# Altium PCB PCB1.pcbdoc (part 2 of 2)
Units mil, origin at the board's own origin, x right, y up, seen from the top; angles counter-clockwise.
Board outline 2780 x 2060 mil, 2 copper layers (Top Layer, Bottom Layer); 80 components, 64 nets, 301 pads, 176 vias.
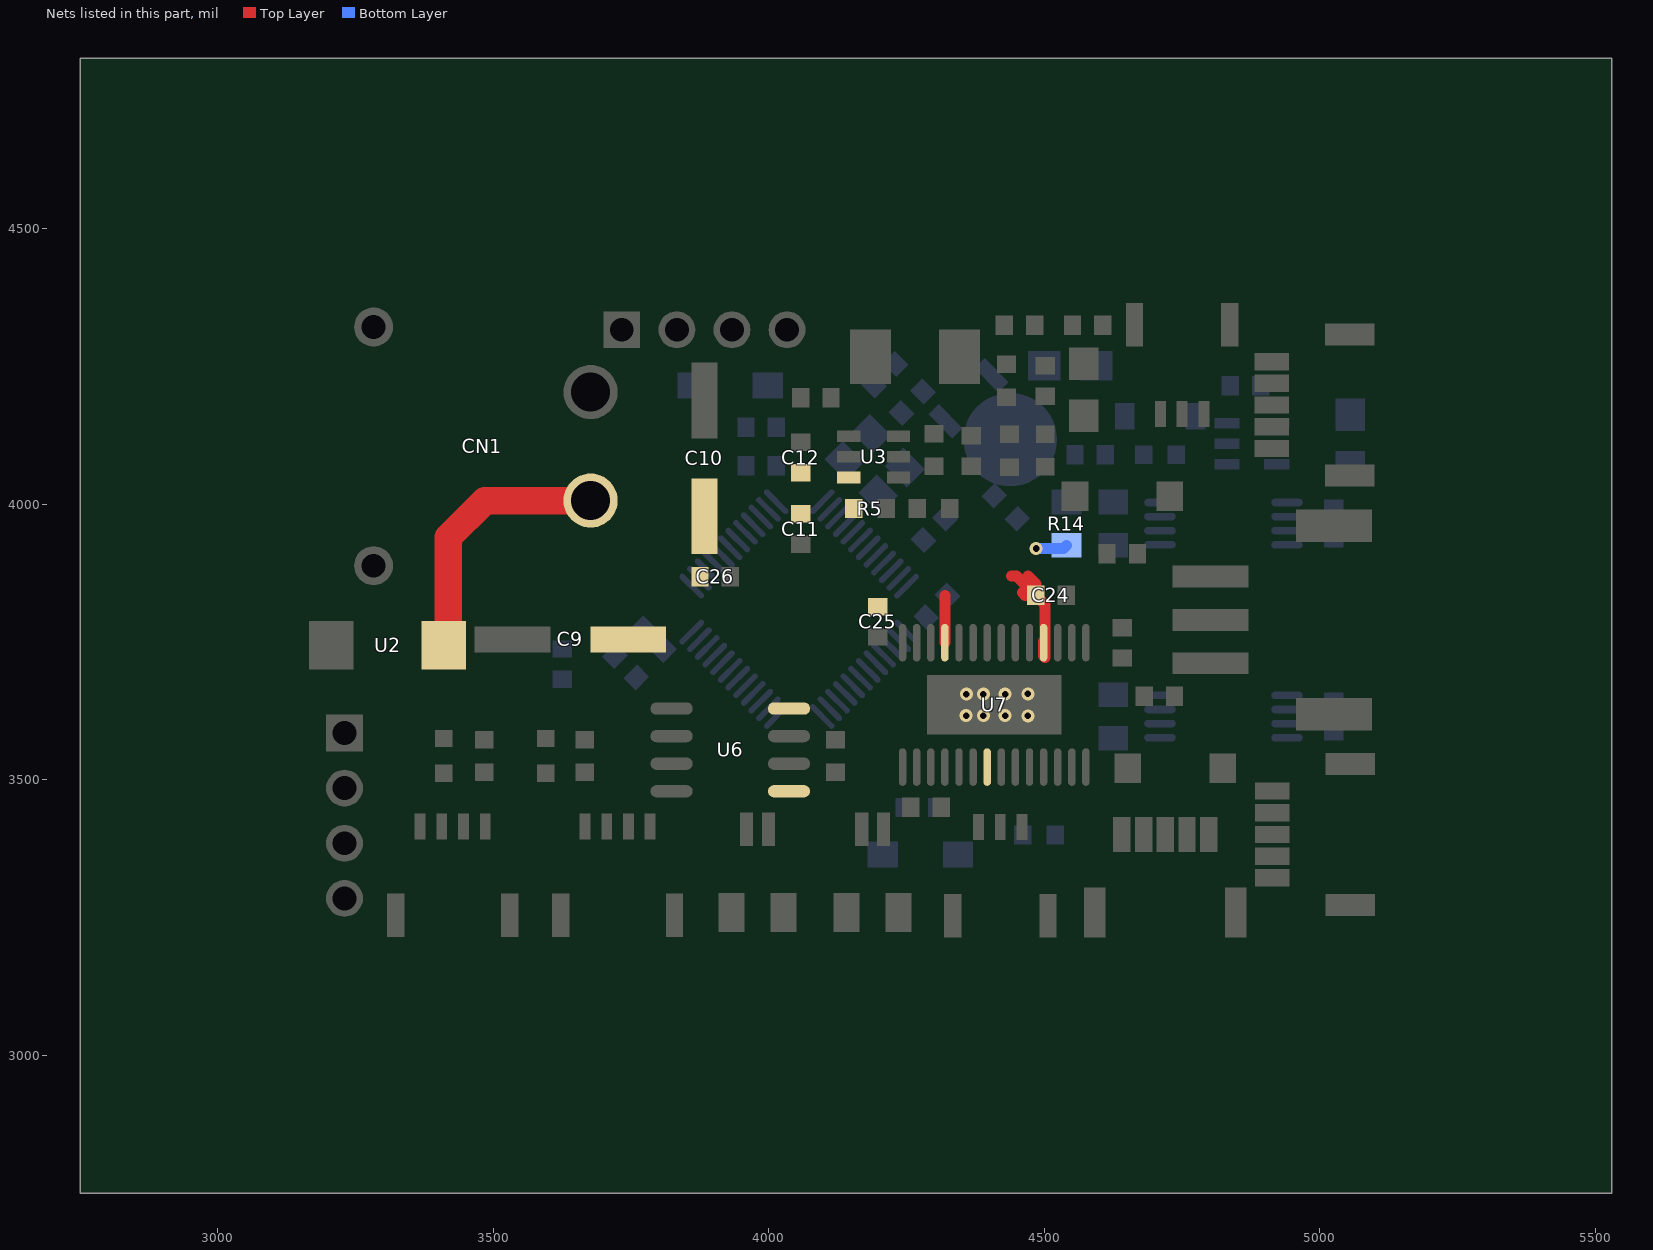
[diagram p2: the nets of this part, all layers, seen from the top]

## Via types
v1: diameter 24.02, hole 12.01, Top Layer to Bottom Layer, 87 vias
v2: diameter 23.62, hole 11.81, Top Layer to Bottom Layer, 34 vias
v3: diameter 24.02, hole 11.97, Top Layer to Bottom Layer, 26 vias
v4: diameter 20.87, hole 12.01, Top Layer to Bottom Layer, 7 vias
v5: diameter 35.43, hole 12.01, Top Layer to Bottom Layer, 5 vias
v6: diameter 25, hole 12.01, Top Layer to Bottom Layer, 3 vias
v7: diameter 49.37, hole 11.81, Top Layer to Bottom Layer, 3 vias
v8: diameter 22.83, hole 12.01, Top Layer to Bottom Layer, 3 vias
v9: diameter 22.44, hole 12.01, Top Layer to Bottom Layer, 2 vias
v10: diameter 24.02, hole 11.81, Top Layer to Bottom Layer, 1 vias
v11: diameter 49.21, hole 12.01, Top Layer to Bottom Layer, 1 vias
v12: diameter 31.5, hole 12.01, Top Layer to Bottom Layer, 1 vias
v13: diameter 23.62, hole 12.01, Top Layer to Bottom Layer, 1 vias
v14: diameter 19.68, hole 12.01, Top Layer to Bottom Layer, 1 vias
v15: diameter 24.41, hole 12.01, Top Layer to Bottom Layer, 1 vias

## Nets (pads, with @x,y where several pads share a name; then routed paths per layer and width w, separated by ;. In a path a pad name is that pad's centre, name@x,y a point inside that pad or via, vN(x,y) a via of type N, cw(c..) or ccw(c..) an arc to the next point about the centre after c; other vN are vias at no path point) (continued)
VCC: C9.1 C10.1 C11.2 C12.2 C24.1 C25.2 C26.2 CN1.2 R5.2 R14.2 U2.1 U3.3 U7.4 U7.11 | length 915.2
  Top Layer w20: U7.11@4319.44,3749.01 4319.44,3835 ; 4440,3870 4449.44,3870 C24.1@4469.72,3849.72 ; 4465,3835 4460,3840 C24.1@4469.72,3849.72 ; C24.1@4469.72,3849.72 4470,3850 4470,3870 4484.44,3855.56 C24.1@4484.44,3835 4501.42,3818.02 U7.4@4501.42,3755.05 ; U7.4@4501.42,3755.05 4498.58,3752.21 U7.4@4498.58,3749.01 4498.58,3725.28 4501.42,3722.44 U7.4@4501.42,3755.05
  Top Layer w50: U2.1@3415.29,3730.26 3418.27,3733.24 3418.27,3940.26 3484.84,4006.83 CN1.2@3676.51,4006.83
  Bottom Layer w20: v1(4485,3920) 4534.37,3920 R14.2@4540,3925.63
"": U6.5 U6.8 U7.21
  other v2: 4470.01,3616.19 4358.01,3616.69 4389.32,3616.5 4428.69,3616.5 4358.51,3655.69 4389.32,3655.87 4428.69,3655.87 4470.01,3656.19

## Polygon pours and split planes (outlines as drawn)
AGND on Bottom Layer (solid, remove dead copper, pour order 1): 5015,4115 5101.13,4115 5101.13,4220 5015,4220
AGND on Bottom Layer (solid, remove dead copper, pour order 2): 5015,4105 5110,4105 5110,4220 5015,4220
GND on Bottom Layer (solid, remove dead copper, pour order 3): 3020,3050 5230,3050 5230,4430 3020,4430
GND on Top Layer (solid, remove dead copper, pour order 5): 3070,3035 5250,3035 5250,4475 3070,4475
GND on Bottom Layer (solid, remove dead copper, pour order 6): 3000,3000 5280,3000 5280,4560 3000,4560
AGND on Bottom Layer (solid, remove dead copper, pour order 0): 4138.14,3876.13 4205.94,3803.94 4269.06,3803.94 4340.94,3733.94 4436.26,3733.94 4500.94,3668.94 4500.94,3573.84 4561.22,3509.02 5112.72,3509.02 5112.72,4204.97 5010.05,4204.97 4969.02,4163.94 4945.94,4163.94 4935.94,4173.94 4935.94,4243.82 4920.83,4258.94 4620.94,4258.94 4490.94,4128.94 4490.94,4067.18 4400.84,3978.94 4390.94,3978.94 4315.94,4053.94
VCC on Top Layer (solid, remove dead copper, pour order 4): 4086.21,4068.79 4094.99,4060 4175,4060 4185,4050 4185,3955 4200,3940 4490,3940 4510,3920 4510,3715 4505,3710 4496.74,3710 4488.93,3716.2 4488.93,3813.03 4481.96,3820 4335,3820 4330,3815 4330,3715 4325,3710 4313.54,3710 4310,3713.56 4310,3805 4295,3820 4205,3820 4155,3870 4115,3870 4095,3890 4095,3946.03 4086.08,3954.95 4074.8,3954.95

## Keep-outs
Board Outline Layer:
  lines w10 net "": 3148.27,3277.89 ccw(c3227.01,3277.89) 3227.01,3199.15 5038.03,3199.15 ccw(c5038.03,3277.89) 5116.77,3277.89 5116.77,4301.52 ccw(c5038.03,4301.52) 5038.03,4380.26 3227.01,4380.26 ccw(c3227.01,4301.52) 3148.27,4301.52 3148.27,3277.89

## Other copper
Top Layer:
  region net 3V3: 4260,3488.82 4301.14,3488.82 4301.14,3555 4260,3555
  region net VCC: 4022.56,3955 4175,3955 4175,4007.92 4022.56,4007.92
  region net VCC: 3828.27,3720.26 3675.83,3720.26 3668.27,3727.82 3668.27,3888.16 3623.27,3933.16 3623.27,4055.07 3637.57,4070.77 4083.57,4070.77 4083.57,3970.85 4074.8,3954.95 3947.97,3954.95 3828.27,3835.26
  region net DRV_OUT_3_CS: 4366.52,3713.13 4376.07,3713.13 4380.57,3717.96 4380.94,3782.63 4383.06,3786.53 4383.18,3801.05 4379.37,3805.79 4363.21,3805.79 4356.01,3796.39 4360.33,3776.63 4360.33,3717.02 4364.18,3713.17 4364.18,3713.14 4366.51,3713.14
  region net DRV_OUT_2: 4386.56,3717.51 4390.5,3712.79 4402.05,3712.79 4402.17,3712.68 4406.06,3716.57 4406.62,3778.88 4417.58,3790.87 4417.58,3802.74 4412.39,3807.93 4395.3,3807.93 4390.62,3801.97 4390.29,3786.34 4387.32,3779.9
  region net DRV_OUT_1_CS: 4462.51,3718.86 4468.32,3712.91 4477.78,3712.91 4481.98,3716.94 4481.98,3800.52 4476.41,3806.09 4463.88,3806.09 4457.5,3799.71 4457.5,3785.47 4462.51,3780.46
  region net +5V: 4310.17,4320 4385,4320 4385,4345 4445,4345 4445,4300 4460,4285 4524.68,4285 4534.53,4275.15 4534.53,4233.49 4524.73,4223.69 4393.69,4223.69 4385,4215 4310,4215 4305,4220 4305,4314.83
  region net VCC: 3890.33,3897.59 3890.33,3851.44 3836.92,3851.44 3836.92,3896.34 3835.9,3897.37
  region net NRST: 4521.02,4041.74 4529.23,4047.68 cw(c4555.74,4074.19) 4518.62,4068.89 4499.81,4052.34 cw(c4494.51,4015.22)
  region net 3V3: 4481.46,4108.54 4488.54,4101.46 cw(c4513.84,4076.16) 4509.34,4111.66 4484.6,4122.28 cw(c4472.09,4117.91)
  region net NRST: 4619.71,3945.72 4607.71,3945.72 cw(c4585.21,3945.72) 4598.71,3927.72 4628.71,3927.72 cw(c4642.21,3945.72)
  region net VCC: 3609.51,4031.83 3609.51,3981.83 3611.53,3981.77 3614.78,3981.48 3618.2,3980.94 3621.74,3980.19 3625.33,3979.22 3628.89,3978.07 3632.37,3976.73 3635.68,3975.24 3638.76,3973.59 3640.65,3972.42 3642.39,3971.2 3643.96,3969.92 3643.96,4043.74 3642.39,4042.47 3640.65,4041.24 3638.76,4040.07 3635.68,4038.42 3632.37,4036.93 3628.89,4035.59 3625.33,4034.44 3621.74,4033.47 3618.2,4032.72 3614.78,4032.18 3611.53,4031.89
  region net VCC: 3443.27,3863.42 3393.27,3863.42 cw(c3261.06,3863.42) 3369.94,3788.42 3450.55,3788.42 cw(c3833.34,3863.42)
  region net TPS_SW: 4176.17,4078.67 4176.17,4093.67 cw(c4176.17,4127.3) 4165.97,4095.25 4165.97,4077.08 cw(c4176.17,4045.04)
  region net TPS_EN: 4203.64,4075.13 4207.75,4065.09 cw(c4294.52,3978.31) 4219.84,4075.69 4214.25,4087.22 cw(c4116.86,4161.9)
  region net $1N3797: 4214.76,4155.25 4193.04,4148.7 cw(c4019.48,3975.14) 4214.25,4124.5 4238.96,4134.04 cw(c4388.32,4328.81)
  region net TPS_EN: 4243.85,3985 4243.85,3995 cw(c4243.85,4013.75) 4228.85,4002.5 4228.85,3977.5 cw(c4243.85,3966.25)
  region net TPS_EN: 4238.24,3995 4238.24,3985 cw(c4238.24,3966.25) 4253.24,3977.5 4253.24,4002.5 cw(c4238.24,4013.75)
  region net $1N3797: 4158.6,4183.87 4158.6,4203.87 cw(c4158.6,4266.05) 4128.6,4211.59 4128.6,4176.15 cw(c4158.6,4121.7)
  region net TPS_SW: 4080.75,4160.24 4089.39,4172.82 cw(c4129.16,4212.59) 4073.48,4204.64 4048.93,4176.15 cw(c4040.98,4120.47)
  region net TPS_SW: 4070.23,4224.67 4045.23,4224.67 cw(c4011.45,4224.67) 4042.6,4211.59 4072.87,4211.59 cw(c4104.02,4224.67)
  region net +5V: 4511.21,4227.93 4525.35,4242.07 cw(c4544.47,4261.19) 4519.44,4250.97 4500.34,4235.81 cw(c4481.02,4197.74)
  region net $1N4136: 4393.1,4172.44 4406.46,4157.53 ccw(c4387.33,4176.66) 4414.31,4178.74 4414.31,4210.49 cw(c4336.74,4228.8)
  region net $1N4136: 4346.48,4118.38 4346.48,4138.38 cw(c4346.48,4352.77) 4316.48,4140.49 4316.48,4116.27 cw(c4346.48,3903.99)
  region net $1N4196: 4269.18,4052.9 4283.32,4038.76 cw(c4318.21,4003.87) 4316.48,4053.18 4282.47,4053.18 ccw(c4275.97,4046.11)
  region net $1N4196: 4346.48,4059.06 4346.48,4079.06 cw(c4346.48,4293.45) 4316.48,4081.17 4316.48,4056.95 cw(c4346.48,3844.67)
  region net $1N4136: 4319.35,4138.38 4319.35,4118.38 cw(c4319.35,4066.86) 4349.35,4108.74 4349.35,4140.24 cw(c4319.35,4381.11)
  region net $1N4136: 4405.99,4157.05 4382.11,4161.45 cw(c4208.55,4335.01) 4357.91,4140.24 4384.78,4114.63 cw(c4459.02,4104.02)
  region net $1N4196: 4319.35,4079.06 4319.35,4059.06 cw(c4319.35,3973.54) 4349.35,4053.62 4349.35,4085.12 cw(c4319.35,4156.33)
  region net $1N4196: 4414.78,4059.06 4414.78,4079.06 cw(c4414.78,4293.45) 4384.78,4081.17 4384.78,4056.95 cw(c4414.78,3844.67)
  region net $1N4196: 4389.76,4079.06 4389.76,4059.06 cw(c4389.76,3994.89) 4419.76,4051.61 4419.76,4083.36 cw(c4389.76,4185.72)
  region net CAN_TX: 3848.54,3647.45 3838.22,3651.29 3836.65,3649.8 3834.94,3648.34 3833.1,3646.93 3831.16,3645.6 3829.13,3644.37 3827.04,3643.28 3824.91,3642.34 3823.47,3641.82 3822.02,3641.38 3820.58,3641.05 3819.14,3640.81 3817.72,3640.69 3817.01,3640.68 3852.26,3640.57 3851.55,3640.71 3850.87,3640.91 3850.24,3641.17 3849.65,3641.49 3849.12,3641.85 3848.65,3642.26 3848.24,3642.7 3847.91,3643.18 3847.65,3643.68 3847.48,3644.2 3847.39,3644.74 3847.4,3645.29 3847.52,3645.84 3847.74,3646.39 3848.08,3646.93
  region net 3V3: 3779.49,3539.49 3779.49,3519.49 3796.3,3518.3 3796.3,3540.68
  region net CAN_RX: 3865,3474.49 3865,3484.49 3864.14,3484.76 3853.22,3489.71 3851.56,3490.41 3850.7,3490.68 3850.7,3468.3 3851.56,3468.57 3862.48,3473.52 3864.14,3474.22
  region net CAN_H: 4091.15,3573.49 4091.15,3585.49 4089.72,3585.71 4064.16,3590.62 4063.7,3590.68 4063.7,3568.3 4065.13,3568.52 4090.68,3573.43
  region net CAN_H: 3981.85,3585.49 3981.85,3573.49 3983.47,3573.55 3984.99,3573.71 3986.42,3573.95 3989.03,3574.56 3991.95,3575.29 3993.03,3575.49 3994.09,3575.6 3994.61,3575.61 3995.12,3575.59 3995.63,3575.53 3996.13,3575.43 3996.64,3575.29 3997.15,3575.1 3997.65,3574.86 3998.16,3574.57 3998.68,3574.23 3999.2,3573.82 3999.72,3573.36 4000.25,3572.83 4000.79,3572.22 4000.79,3586.76 4000.25,3586.15 3999.72,3585.62 3999.2,3585.16 3998.68,3584.75 3998.16,3584.41 3997.65,3584.12 3997.15,3583.88 3996.64,3583.69 3996.13,3583.55 3995.63,3583.45 3995.12,3583.39 3994.61,3583.37 3994.09,3583.38 3993.03,3583.49 3991.95,3583.69 3988.41,3584.58 3986.42,3585.03 3984.99,3585.27 3983.47,3585.43
  region net CAN_L: 4140.89,3485.04 4150.51,3492.4 cw(c4182.33,3524.22) 4137.78,3517.85 4115.44,3497.77 cw(c4109.07,3453.22)
  region net CAN_H: 4085.77,3585.49 4085.77,3573.49 cw(c4085.77,3550.99) 4103.77,3564.49 4103.77,3586.76 cw(c4085.77,3714.12)
  region net CAN_H: 4140.89,3544.36 4150.51,3551.72 cw(c4182.33,3583.54) 4137.78,3577.17 4115.44,3557.09 cw(c4109.07,3512.54)
  region net $1N7023: 4605.97,3791 4605.97,3779 cw(c4605.97,3756.5) 4623.97,3770 4623.97,3791.97 cw(c4605.97,3957.71)
  region net $1N7020: 4613.73,3703.6 4622.21,3695.12 cw(c4647.06,3670.27) 4645.18,3705.36 4623.97,3726.57 cw(c4588.88,3728.45)
  region net $1N7264: 4520.76,3814.24 4529.24,3805.76 cw(c4615.89,3719.11) 4542.56,3817.28 4523.81,3830.02 cw(c4510.61,3824.39)
  region net PWM_AUX1: 4795.37,4204.37 4783.37,4204.37 cw(c4746.22,4204.37) 4779.53,4187.92 4799.21,4187.92 cw(c4832.52,4204.37)
  region net 3V3: 3774.46,4270.58 3779.21,4282.8 cw(c3811.03,4314.62) 3766.48,4308.26 3749,4283.31 cw(c3742.64,4238.76)
  region net CAN_H: 4213.94,3459.28 4201.94,3459.28 cw(c4073.31,3459.28) 4200.68,3441.28 4215.21,3441.28 cw(c4342.58,3459.28)
  region net CAN_L: 4174.58,3459.28 4162.58,3459.28 cw(c4033.95,3459.28) 4161.32,3441.28 4175.85,3441.28 cw(c4303.22,3459.28)
  region net +5V: 4875,4110 4875,4090 cw(c4875,4080.67) 4880.91,4087.89 4880.91,4112.11 cw(c4875,4119.33)
  region net +5V: 4900,4055.77 4920,4055.77 cw(c4957.5,4055.77) 4935,4085.77 4885,4085.77 cw(c4862.5,4055.77)
  region net ENC_A: 4960,4171.26 4960,4191.26 cw(c4960,4220.95) 4943.9,4196 4943.9,4164.51 cw(c4960,4148.69)
  region net ENC_B: 4960,4210.63 4960,4230.63 cw(c4960,4260.32) 4943.9,4235.37 4943.9,4203.88 cw(c4960,4188.06)
  region net ENC_Z: 4960,4250 4960,4270 cw(c4960,4299.69) 4943.9,4274.74 4943.9,4243.25 cw(c4960,4227.43)
  region net +5V: 4871.74,3332.33 4871.74,3312.33 cw(c4871.74,3287.57) 4881.74,3310.22 4881.74,3334.44 cw(c4871.74,3357.09)
  region net SPI1_MOSI: 4958.93,3395.07 4958.93,3407.07 cw(c4958.93,3422.77) 4944.73,3416.07 4944.73,3386.07 cw(c4958.93,3379.36)
  region net SPI1_MISO: 4959.41,3429.63 4959.41,3449.63 cw(c4959.41,3469.34) 4944.73,3456.18 4944.73,3424.69 cw(c4959.42,3405.32)
  region net SPI1_SCK: 4959.41,3469 4959.41,3489 cw(c4959.41,3508.71) 4944.73,3495.55 4944.73,3464.06 cw(c4959.42,3444.69)
  region net $1N11754: 3440.88,3508.83 3440.88,3518.83 cw(c3440.88,3537.58) 3425.88,3526.33 3425.88,3501.33 cw(c3440.88,3490.08)
  region net $1N11757: 3625.89,3507.21 3625.89,3517.21 cw(c3625.89,3535.96) 3610.89,3524.71 3610.89,3499.71 cw(c3625.89,3488.46)
  region net $1N11754: 3451.45,3518.83 3451.45,3508.83 cw(c3451.45,3490.08) 3466.45,3501.33 3466.45,3526.33 cw(c3451.45,3537.58)
  region net 3V3: 3453.72,3551.9 3463.34,3544.55 cw(c3495.16,3512.73) 3488.8,3557.27 3466.45,3577.35 cw(c3421.9,3583.72)
  region net $1N11757: 3633.77,3517.21 3633.77,3507.21 cw(c3633.77,3488.46) 3648.77,3499.71 3648.77,3524.71 cw(c3633.77,3535.96)
  region net KEY: 4675.05,3616.5 4687.05,3616.5 cw(c4709.55,3616.5) 4696.05,3634.5 4666.05,3634.5 cw(c4652.55,3616.5)
  region net KEY: 4645.39,3476.73 4657.39,3476.73 cw(c4679.89,3476.73) 4666.39,3494.73 4636.39,3494.73 cw(c4622.89,3476.73)
  region net KEY: 4685.3,3546.93 4676.81,3555.41 cw(c4659.3,3572.92) 4656.94,3548.27 4675.6,3524.5 cw(c4708.75,3523.47)
  region net NRST: 4586.57,3975.5 4592.5,3986.54 cw(c4624.32,4018.36) 4579.77,4012 4561.12,3988.23 cw(c4554.75,3943.68)
  region net NRST: 4524.52,4052.38 4520.74,4042.02 cw(c4494.22,4015.5) 4531.35,4020.81 4545.74,4041.77 cw(c4551.04,4078.89)
  region net $1N7020: 4544,3710 4556,3710 4556.51,3721.68 4543.01,3721.68 4543.96,3710.75
  region net DRV_EN: 4415.8,3485.48 4427.8,3485.48 4428.52,3495.33 4428.55,3496.03 4415.05,3496.03 4415.77,3486.18
  region net DRV_FAULT: 4329.21,3478.72 4336.8,3485.27 4335.81,3486.18 4334.82,3486.95 4333.85,3487.59 4332.91,3488.13 4330.28,3489.43 4329.51,3489.83 4328.8,3490.25 4328.46,3490.48 4328.15,3490.73 4327.86,3490.99 4327.59,3491.28 4327.34,3491.59 4327.11,3491.93 4326.9,3492.3 4326.72,3492.7 4326.56,3493.15 4326.43,3493.63 4326.33,3494.16 4326.26,3494.73 4326.21,3495.35 4326.19,3496.03 4312.69,3496.03 4312.74,3494.48 4312.84,3493.54 4312.98,3492.68 4313.16,3491.88 4313.38,3491.15 4313.64,3490.47 4313.95,3489.85 4314.28,3489.28 4314.66,3488.75 4315.07,3488.26 4315.51,3487.81 4315.98,3487.39 4316.48,3487 4317.28,3486.44 4318.44,3485.75 4322.42,3483.67 4324.24,3482.62 4325.75,3481.63 4326.89,3480.78 4328.05,3479.81
  region net 3V3: 4281.46,3503.09 4285.62,3513.07 4284.63,3514 4283.64,3514.81 4282.2,3515.84 4279.1,3517.77 4278.33,3518.3 4277.62,3518.85 4277.28,3519.14 4276.97,3519.45 4276.68,3519.77 4276.41,3520.11 4276.16,3520.47 4275.93,3520.86 4275.72,3521.28 4275.54,3521.72 4275.38,3522.2 4275.25,3522.72 4275.15,3523.27 4275.08,3523.86 4275.01,3525.17 4275.01,3498.93 4275.06,3499.64 4275.18,3500.32 4275.38,3500.97 4275.64,3501.58 4275.96,3502.14 4276.34,3502.65 4276.76,3503.09 4277.22,3503.46 4277.71,3503.76 4278.23,3503.98 4278.77,3504.1 4279.31,3504.12 4279.86,3504.04 4280.41,3503.84 4280.94,3503.53
  region net 3V3: 3467.85,3566.02 3476.33,3557.54 3476.69,3557.87 3477.5,3558.54 3478.44,3559.18 3479.46,3559.78 3480.53,3560.31 3481.62,3560.76 3482.69,3561.1 3483.21,3561.22 3483.72,3561.31 3484.2,3561.36 3471.67,3573.89 3471.53,3572.9 3471.26,3571.85 3470.86,3570.77 3470.37,3569.68 3469.8,3568.63 3469.17,3567.65 3468.51,3566.77
  region net 3V3: 3383.08,3463.07 3374.6,3471.56 3374.24,3471.22 3373.41,3470.56 3372.44,3469.92 3371.39,3469.32 3370.27,3468.79 3369.15,3468.34 3368.05,3468 3367.52,3467.87 3367.01,3467.79 3366.53,3467.74 3379.26,3455 3379.4,3455.99 3379.68,3457.07 3380.07,3458.18 3380.57,3459.31 3381.14,3460.4 3381.76,3461.42 3382.42,3462.32
  region net DRV_FAULT: 4340.67,3481.4 4333.6,3474.33 4334.02,3473.98 4334.52,3473.69 4335.07,3473.45 4335.67,3473.25 4336.95,3472.93 4338.88,3472.51 4339.47,3472.34 4340.01,3472.14 4340.49,3471.91 4340.89,3471.62 4341.2,3471.27 4341.42,3470.85 4341.51,3470.36 4354.25,3483.09 4353.46,3483.08 4352.61,3482.97 4351.73,3482.78 4349.88,3482.23 4346.08,3480.97 4345.16,3480.74 4344.28,3480.57 4343.44,3480.48 4342.65,3480.51 4341.91,3480.66 4341.25,3480.95
  region net SPI1_MOSI: 4943.65,3407.07 4943.65,3395.07 4944.23,3395.04 4944.8,3394.98 4945.37,3394.87 4945.94,3394.72 4946.5,3394.53 4947.06,3394.32 4948.14,3393.79 4949.19,3393.18 4950.2,3392.49 4951.62,3391.38 4952.06,3390.99 4952.06,3409.01 4951.61,3408.65 4951.16,3408.33 4950.68,3408.06 4950.2,3407.84 4949.7,3407.65 4949.19,3407.49 4948.67,3407.36 4947.61,3407.19 4946.51,3407.1
  region net CAN_TX: 4005.65,3945 4005.65,3935 4006.59,3934.96 4007.4,3934.84 4008.09,3934.65 4008.68,3934.39 4009.18,3934.06 4009.62,3933.68 4010.01,3933.25 4010.36,3932.77 4011.4,3931.09 4012.24,3929.84 4012.76,3929.18 4013.36,3928.52 4014.06,3927.85 4014.06,3945.86 4013.55,3945.45 4013.05,3945.12 4012.57,3944.87 4012.09,3944.69 4011.62,3944.57 4011.15,3944.51 4010.68,3944.49 4010.2,3944.51 4009.21,3944.62 4006.97,3944.94
  region net DRV_EN: 4425.2,3480.39 4416.72,3488.88 4416.36,3488.55 4415.53,3487.88 4414.57,3487.24 4413.51,3486.64 4412.4,3486.11 4411.27,3485.66 4410.17,3485.32 4409.64,3485.2 4409.13,3485.11 4408.65,3485.06 4421.39,3472.32 4421.52,3473.31 4421.8,3474.39 4422.2,3475.51 4422.69,3476.63 4423.26,3477.72 4423.88,3478.74 4424.54,3479.64
  region net DRV_IN1: 4147.32,3709.2 4155.8,3717.68 4155.47,3718.04 4154.81,3718.87 4154.17,3719.84 4153.57,3720.89 4153.03,3722.01 4152.58,3723.13 4152.24,3724.23 4152.12,3724.76 4152.03,3725.27 4151.98,3725.75 4139.25,3713.02 4140.24,3712.88 4141.31,3712.6 4142.43,3712.2 4143.56,3711.71 4144.65,3711.14 4145.66,3710.52 4146.57,3709.86
  region net DRV_IN1: 4234.79,3662.93 4234.79,3650.93 4235.27,3650.92 4236.33,3650.8 4237.47,3650.57 4238.64,3650.25 4239.8,3649.84 4240.92,3649.36 4241.93,3648.82 4242.4,3648.53 4242.82,3648.23 4243.19,3647.93 4243.19,3665.94 4242.4,3665.34 4241.44,3664.77 4240.37,3664.26 4239.22,3663.82 4238.05,3663.45 4236.89,3663.17 4235.79,3663
  region net DRV_EN: 4050.8,3692.32 4042.32,3700.8 4041.94,3700.33 4041.66,3699.77 4041.46,3699.15 4041.32,3698.48 4041.24,3697.78 4041.1,3694.91 4041.04,3694.26 4040.94,3693.66 4040.77,3693.12 4040.54,3692.68 4040.22,3692.33 4039.79,3692.09 4039.25,3691.98 4051.98,3679.25 4051.98,3679.99 4051.89,3680.79 4051.73,3681.63 4050.73,3685.27 4050.24,3687.11 4050.06,3688 4049.93,3688.86 4049.88,3689.67 4049.93,3690.44 4050.09,3691.14 4050.37,3691.77
  region net DRV_FAULT: 4191.39,3595.33 4179.39,3595.33 4179.37,3594.84 4179.25,3593.79 4179.02,3592.65 4178.7,3591.48 4178.29,3590.31 4177.81,3589.2 4177.27,3588.18 4176.98,3587.72 4176.69,3587.3 4176.38,3586.92 4194.39,3586.92 4193.79,3587.72 4193.23,3588.68 4192.72,3589.75 4192.27,3590.89 4191.9,3592.07 4191.62,3593.23 4191.45,3594.33
  region net DRV_FAULT: 4102.92,3695.03 4102.92,3707.03 4102.43,3707.04 4101.37,3707.16 4100.24,3707.39 4099.06,3707.72 4097.9,3708.13 4096.79,3708.61 4095.77,3709.14 4095.31,3709.43 4094.89,3709.73 4094.51,3710.03 4094.51,3692.02 4095.31,3692.63 4096.26,3693.19 4097.33,3693.7 4098.48,3694.15 4099.65,3694.51 4100.81,3694.79 4101.91,3694.97
  region net SENSE_3: 4962.32,3889.2 4970.8,3897.68 4970.47,3898.04 4969.81,3898.87 4969.17,3899.84 4968.57,3900.89 4968.03,3902.01 4967.58,3903.13 4967.24,3904.23 4967.12,3904.76 4967.03,3905.27 4966.98,3905.75 4954.25,3893.02 4955.24,3892.88 4956.31,3892.6 4957.43,3892.2 4958.56,3891.71 4959.65,3891.14 4960.66,3890.52 4961.57,3889.86
  region net SENSE_3: 4941,3544.94 4929,3544.94 4928.98,3544.45 4928.86,3543.39 4928.63,3542.26 4928.31,3541.09 4927.9,3539.92 4927.42,3538.81 4926.88,3537.79 4926.59,3537.33 4926.29,3536.91 4925.99,3536.53 4944,3536.53 4943.69,3536.91 4943.39,3537.33 4942.83,3538.28 4942.32,3539.36 4941.88,3540.5 4941.51,3541.67 4941.24,3542.83 4941.06,3543.93 4941.02,3544.45
  region net SENSE_BAT: 4524.2,3962.68 4532.68,3954.2 4533.04,3954.53 4533.87,3955.19 4534.84,3955.83 4535.89,3956.43 4537.01,3956.97 4538.13,3957.42 4539.23,3957.76 4539.76,3957.88 4540.27,3957.97 4540.75,3958.02 4528.02,3970.75 4527.88,3969.76 4527.6,3968.69 4527.2,3967.57 4526.71,3966.44 4526.14,3965.35 4525.52,3964.34 4524.86,3963.43
  region net 3V3: 4290,3431.35 4280,3431.35 4279.98,3430.78 4279.91,3430.21 4279.8,3429.64 4279.66,3429.08 4279.47,3428.51 4279.02,3427.41 4278.46,3426.33 4277.81,3425.29 4277.11,3424.3 4275.99,3422.94 4294.01,3422.94 4292.89,3424.3 4292.19,3425.29 4291.54,3426.33 4290.98,3427.41 4290.53,3428.51 4290.34,3429.08 4290.2,3429.64 4290.09,3430.21 4290.02,3430.78
  region net 3V3: 4096.42,4307.42 4096.42,4295.42 4097.41,4295.38 4098.33,4295.26 4099.17,4295.06 4099.96,4294.8 4100.7,4294.47 4101.39,4294.08 4102.05,4293.63 4102.69,4293.14 4103.92,4292.04 4107.17,4288.82 4107.92,4288.13 4107.92,4314.71 4106.13,4313.01 4103.61,4310.51 4102.69,4309.7 4102.05,4309.21 4101.39,4308.77 4100.7,4308.38 4099.96,4308.05 4099.17,4307.78 4098.33,4307.59 4097.41,4307.46
  region net 3V3: 3763.56,3682.7 3777.7,3668.56 3778.63,3669.41 3779.07,3669.75 3779.5,3670.05 3779.92,3670.31 3780.33,3670.51 3780.73,3670.68 3781.12,3670.81 3781.51,3670.91 3781.89,3670.97 3782.28,3671 3782.66,3671.01 3783.04,3670.99 3783.81,3670.89 3784.59,3670.72 3787.19,3670.05 3788.17,3669.83 3789.22,3669.66 3790.37,3669.56 3791.61,3669.54 3792.28,3669.56 3775.58,3686.27 3775.43,3685.53 3775.11,3684.97 3774.63,3684.56 3774.02,3684.28 3773.3,3684.11 3772.48,3684.02 3770.64,3684 3767.68,3684.03 3766.72,3683.96 3765.81,3683.82 3764.96,3683.57 3764.21,3683.21
  region net PWM_AUX1: 4975.75,4321.99 4975.75,4309.99 4976.74,4309.95 4977.8,4309.82 4978.89,4309.62 4979.98,4309.34 4981.04,4308.98 4982.04,4308.54 4982.95,4308.02 4983.74,4307.43 4983.74,4324.55 4982.95,4323.96 4982.04,4323.44 4981.04,4323 4979.98,4322.64 4978.89,4322.36 4977.8,4322.15 4976.74,4322.03
  region net KEY: 4588.59,3405.2 4580.1,3413.68 4579.75,3413.35 4578.92,3412.69 4577.95,3412.05 4576.89,3411.45 4575.78,3410.91 4574.66,3410.46 4573.55,3410.12 4573.03,3410 4572.52,3409.91 4572.04,3409.86 4584.77,3397.13 4584.91,3398.12 4585.19,3399.19 4585.58,3400.31 4586.08,3401.44 4586.65,3402.53 4587.27,3403.54 4587.93,3404.45
  region net CAN_RX: 4059.57,3746.64 4066.64,3739.57 4067.09,3739.92 4067.63,3740.19 4068.25,3740.37 4068.94,3740.49 4069.68,3740.54 4070.46,3740.55 4072.12,3740.43 4076.25,3739.92 4077.66,3739.82 4078.26,3739.83 4065.53,3752.57 4065.3,3751.77 4064.75,3750.96 4063.98,3750.16 4063.06,3749.37 4060.25,3747.24
  region net 3V3: 4500.1,4113.02 4493.02,4120.1 4492.61,4119.71 4492.16,4119.35 4491.68,4119.03 4491.17,4118.73 4490.65,4118.46 4489.54,4118 4488.38,4117.64 4487.19,4117.36 4486,4117.16 4484.25,4116.98 4496.98,4104.25 4497.16,4106 4497.36,4107.19 4497.64,4108.38 4498,4109.54 4498.46,4110.65 4498.73,4111.17 4499.03,4111.68 4499.35,4112.16 4499.71,4112.61
  region net NRST: 4229.12,3955 4229.12,3965 4227.13,3965.02 4226.16,3965.08 4225.22,3965.2 4224.3,3965.4 4223.43,3965.71 4222.59,3966.15 4221.82,3966.73 4221.82,3951.08 4223.9,3952.86 4224.75,3953.49 4225.63,3954.04 4226.09,3954.28 4226.56,3954.49 4227.04,3954.66 4227.53,3954.81 4228.04,3954.91 4228.57,3954.98
  region net SPI2_SCK: 4042.6,3410.32 4049.68,3417.4 4049.21,3417.77 4048.67,3418.05 4048.07,3418.26 4047.41,3418.41 4046.02,3418.59 4043.93,3418.75 4043.29,3418.84 4042.7,3418.97 4042.19,3419.15 4041.75,3419.39 4041.41,3419.72 4041.18,3420.15 4041.07,3420.68 4028.34,3407.94 4029.19,3407.96 4030.1,3408.09 4031.03,3408.33 4032.98,3409.01 4036.93,3410.57 4037.88,3410.88 4038.8,3411.11 4039.67,3411.24 4040.5,3411.25 4041.27,3411.11 4041.97,3410.81
  region net SPI2_MOSI: 3955.35,3476.04 3945.35,3476.04 3945.32,3475.47 3945.26,3474.9 3945.15,3474.33 3945,3473.77 3944.82,3473.2 3944.37,3472.1 3943.8,3471.02 3943.16,3469.98 3942.46,3468.99 3941.34,3467.63 3959.35,3467.63 3958.24,3468.99 3957.54,3469.98 3956.89,3471.02 3956.33,3472.1 3955.87,3473.2 3955.69,3473.77 3955.55,3474.33 3955.44,3474.9 3955.37,3475.47
  region net SPI2_MISO: 3989.08,3455.23 3996.15,3462.3 3995.77,3462.71 3995.41,3463.16 3995.09,3463.64 3994.79,3464.15 3994.52,3464.67 3994.06,3465.78 3993.69,3466.94 3993.42,3468.13 3993.21,3469.32 3993.04,3471.07 3980.3,3458.34 3982.05,3458.16 3983.25,3457.96 3984.44,3457.68 3985.6,3457.32 3986.71,3456.86 3987.23,3456.59 3987.73,3456.29 3988.21,3455.97 3988.66,3455.61
  region net I2C2_SCL: 3916.7,3620.04 3916.7,3630.04 3916.13,3630.07 3915.56,3630.13 3914.99,3630.24 3914.42,3630.39 3913.86,3630.57 3912.75,3631.03 3911.67,3631.59 3910.64,3632.23 3909.65,3632.94 3908.29,3634.05 3908.29,3616.04 3909.65,3617.15 3910.64,3617.86 3911.67,3618.5 3912.75,3619.06 3913.86,3619.52 3914.42,3619.7 3914.99,3619.85 3915.56,3619.95 3916.13,3620.02
  region net I2C2_SDA: 3917.02,3598.82 3909.95,3605.89 3909.53,3605.5 3909.08,3605.15 3908.6,3604.82 3908.1,3604.53 3907.57,3604.26 3906.46,3603.79 3905.3,3603.43 3904.11,3603.15 3902.92,3602.95 3901.17,3602.78 3913.91,3590.04 3914.08,3591.79 3914.28,3592.98 3914.56,3594.17 3914.92,3595.33 3915.39,3596.44 3915.66,3596.97 3915.95,3597.47 3916.28,3597.95 3916.63,3598.4
  region net I2C2_SCL: 4057.3,3665.45 4064.37,3658.37 4064.79,3658.76 4065.24,3659.12 4065.72,3659.44 4066.22,3659.74 4066.75,3660.01 4067.85,3660.47 4069.01,3660.83 4070.2,3661.11 4071.4,3661.31 4073.15,3661.49 4060.41,3674.22 4060.24,3672.47 4060.04,3671.28 4059.76,3670.09 4059.39,3668.93 4058.93,3667.82 4058.66,3667.3 4058.37,3666.79 4058.04,3666.31 4057.69,3665.86
  region net I2C2_SDA: 4137.41,3608.94 4144.48,3601.87 4144.89,3602.24 4145.32,3602.59 4145.79,3602.91 4146.28,3603.2 4146.8,3603.47 4147.89,3603.94 4149.03,3604.31 4150.19,3604.6 4151.36,3604.81 4152.5,3604.95 4153.06,3604.99 4140.53,3617.52 4140.43,3616.4 4140.25,3615.24 4140.01,3614.07 4139.67,3612.91 4139.25,3611.79 4139.01,3611.26 4138.74,3610.74 4138.45,3610.25 4138.13,3609.78 4137.78,3609.35
  region net PWM_AUX2: 4284.79,3316 4284.79,3304 4285.74,3303.96 4286.55,3303.84 4287.25,3303.64 4287.83,3303.38 4288.34,3303.05 4288.77,3302.66 4289.15,3302.22 4289.5,3301.73 4290.52,3300.04 4291.36,3298.76 4291.88,3298.1 4292.48,3297.43 4293.19,3296.75 4293.19,3314.76 4292.4,3314.35 4291.45,3314.27 4290.37,3314.44 4289.22,3314.77 4286.88,3315.58 4285.78,3315.88
  region net PWM_AUX2: 3874,3443.65 3886,3443.65 3886.02,3444.14 3886.14,3445.19 3886.36,3446.33 3886.69,3447.5 3887.1,3448.67 3887.58,3449.78 3888.11,3450.8 3888.4,3451.26 3888.7,3451.68 3889.01,3452.06 3870.99,3452.06 3871.6,3451.26 3872.16,3450.3 3872.67,3449.23 3873.12,3448.09 3873.48,3446.92 3873.76,3445.76 3873.94,3444.65
  region net 3V3: 4106.53,4041.99 4096.53,4041.99 4096.48,4041.15 4096.35,4040.25 4096.14,4039.3 4095.86,4038.35 4095.51,4037.42 4095.1,4036.54 4094.65,4035.76 4094.15,4035.1 4108.91,4035.1 4108.41,4035.76 4107.95,4036.54 4107.55,4037.42 4107.2,4038.35 4106.92,4039.3 4106.71,4040.25 4106.57,4041.15
  region net 3V3: 3979.2,4097.68 3987.68,4089.2 3988.04,4089.53 3988.87,4090.19 3989.84,4090.83 3990.89,4091.43 3992.01,4091.97 3993.13,4092.42 3994.23,4092.76 3994.76,4092.88 3995.27,4092.97 3995.75,4093.02 3983.02,4105.75 3982.88,4104.76 3982.6,4103.69 3982.2,4102.57 3981.71,4101.44 3981.14,4100.35 3980.52,4099.34 3979.86,4098.43
  region net 3V3: 3998.02,4084.9 4005.1,4091.98 4004.63,4092.57 4004.34,4093.25 4004.19,4093.99 4004.18,4094.79 4004.27,4095.64 4004.46,4096.53 4005.03,4098.41 4006.38,4102.25 4006.65,4103.18 4006.86,4104.08 4006.97,4104.94 4006.98,4105.75 3994.25,4093.02 3995.18,4092.7 3995.79,4091.97 3996.19,4090.92 3996.69,4088.34 3996.97,4087.03 3997.38,4085.85
  region net 3V3: 3356,3668.24 3344,3668.24 3344.05,3666.96 3344.27,3664.72 3344.33,3663.7 3344.32,3663.21 3344.28,3662.73 3344.19,3662.25 3344.06,3661.78 3343.87,3661.3 3343.61,3660.82 3343.29,3660.33 3342.89,3659.84 3360.9,3659.84 3358.68,3662.27 3357.89,3663.21 3357.2,3664.18 3356.9,3664.69 3356.64,3665.21 3356.42,3665.76 3356.24,3666.33 3356.11,3666.93 3356.03,3667.57
  region net 3V3: 3765.35,3501.21 3766.71,3502.49 3768.77,3504.19 3771.07,3505.87 3774.22,3507.92 3777.65,3509.88 3782.02,3512.09 3786.58,3514.09 3791.22,3515.85 3795.83,3517.31 3799.59,3518.27 3802.49,3518.86 3805.26,3519.26 3807.23,3519.43 3809.11,3519.49 3809.11,3539.49 3807.14,3539.55 3805.11,3539.74 3802.33,3540.17 3799.49,3540.79 3796.61,3541.59 3792.97,3542.82 3789.34,3544.28 3785.04,3546.29 3780.87,3548.54 3776.9,3550.99 3773.19,3553.58 3770.35,3555.82 3767.79,3558.09 3766.85,3559.01 3752.71,3544.87 3753.41,3544.12 3754.05,3543.34 3754.65,3542.53 3755.19,3541.69 3755.68,3540.82 3756.11,3539.93 3756.5,3539.01 3756.83,3538.07 3757.12,3537.12 3757.36,3536.15 3757.62,3534.66 3757.78,3533.16 3757.83,3531.64 3757.77,3530.11 3757.62,3528.58 3757.36,3527.06 3757,3525.55 3756.55,3524.07 3756.01,3522.62 3755.37,3521.2 3754.63,3519.84 3753.81,3518.52 3752.91,3517.27 3751.91,3516.09 3751.21,3515.35
  region net 3V3: 4270.86,3513.69 4271.71,3512.76 4272.56,3511.7 4273.4,3510.51 4274.61,3508.55 4275.76,3506.41 4276.82,3504.14 4277.76,3501.81 4278.57,3499.46 4279.21,3497.16 4279.68,3494.95 4279.88,3493.55 4279.99,3492.24 4280,3491.62 4290,3491.62 4285,3501.62 4277.93,3520.76
  region net 3V3: 4096.42,4307.42 4096.42,4295.42 4104.88,4301.42 4134.4,4319.64
  region net 3V3: 3698.9,3626.95 3700.62,3625.12 3702.32,3623.07 3704.4,3620.23 3706.41,3617.13 3708.71,3613.15 3710.82,3608.95 3712.7,3604.62 3714.32,3600.26 3715.43,3596.64 3716.13,3593.81 3716.67,3591.05 3717.03,3588.39 3717.16,3586.47 3717.19,3585.24 3737.19,3585.24 3727.19,3605.24 3713.05,3641.1
  region net 3V3: 3363.04,3460 3371.52,3451.51 cw(c3388.88,3434.15) 3377.13,3455.71 3367.23,3465.61 cw(c3345.68,3477.35)
  region net 3V3: 3759.07,3678.21 3770.28,3661.14 ccw(c3735.16,3696.26) 3780.18,3675.28 3770.28,3685.18 ccw(c3779.61,3657.66)
Bottom Layer:
  drawing of 114 lines, arcs and shapes, not listed

## Silkscreen, mask and mechanical layers (free items; w line width, h text height)
Top Silkscreen Layer:
  text "GND" at 4689.94,4355.79 h15.75
  text "5V" at 4738.09,4355.79 h15.75
  text "PWM" at 4765.44,4355.4 h15.75
  text "Encoder_ABZ" at 4905,4330 h23.62
  text "PWR" at 3353.27,4320.26 h40
  text "OLED" at 3558.27,4320.26 h40
  text "-" at 3200,4315 h31.5 r90
  text "Z" at 5109.16,4253.74 h15.75 r90
  text "GND" at 3815.14,4240.24 h15.75
  text "SCL" at 3919.95,4240.24 h15.75
  text "SDA" at 4019.56,4240.24 h15.75
  text "3V3" at 3718.45,4239.46 h15.75
  text "B" at 5109.16,4213.97 h15.75 r90
  text "A" at 5109.01,4172.68 h15.75 r90
  text "AUX1" at 4632.63,4145.12 h23.62
  text "GND" at 5108.77,4122.12 h15.75 r90
  text "5V" at 5108.61,4090.4 h15.75 r90
  text "Reset" at 4560,4080 h23.62
  text "Motor" at 4840,3995 h31.5
  text "+" at 3194.19,3876.23 h31.5 r90
  text "Driver" at 4235,3795 h40
  text "v0.1" at 4099.09,3758.43 h39.37
  text "iFOC" at 3819.09,3693.43 h157.48
  text "By Matrixchung" at 3794.09,3658.43 h59.06
  text "Debug" at 3290,3645 h40 r270
  text "3V3" at 3380,3610 h31.5
  text "3V3" at 3154.13,3599.07 h15.75 r270
  text "Key" at 4655.46,3585.67 h23.62
  text "SPI1" at 4925,3545 h31.5
  text "DIO" at 3153.74,3499.07 h15.75 r270
  text "SCK" at 5108.02,3461.82 h15.75 r90
  text "SPI2" at 4620,3420 h31.5 r90
  text "MISO" at 5108.02,3417.73 h15.75 r90
  text "UART" at 3500,3415 h31.5
  text "I2C" at 3800,3415 h31.5
  text "CAN" at 4050,3415 h31.5
  text "AUX2" at 4475,3405 h31.5
  text "CLK" at 3153.89,3399.06 h15.75 r270
  text "MOSI" at 5108.02,3374.42 h15.75 r90
  text "GND" at 5108.02,3336.63 h15.75 r90
  text "5V" at 5108.17,3308.96 h15.75 r90
  text "GND" at 3154.29,3302.21 h15.75 r270
  text "CAN_H" at 4063.73,3258.51 h15.75 r270
  text "CAN_H" at 4272.14,3258.58 h15.75 r270
  text "CAN_L" at 3875,3255 h15.75 r270
  text "CAN_L" at 4084.35,3254.56 h15.75 r270
  text "3V3" at 3354.29,3204.97 h15.75
  text "GND" at 3388.54,3204.97 h15.75
  text "TX" at 3435,3205 h15.75
  text "RX" at 3475.41,3205 h15.75
  text "PWM" at 4360.19,3204.57 h15.75
  text "5V" at 4630.95,3204.81 h15.75
  text "GND" at 4658.61,3204.97 h15.75
  text "MOSI" at 4696.41,3204.97 h15.75
  text "MISO" at 4739.72,3204.97 h15.75
  text "SCK" at 4783.81,3204.97 h15.75
  text "3V3" at 3650.73,3204.42 h15.75
  text "GND" at 3687.19,3204.42 h15.75
  text "SCL" at 3733.26,3203.63 h15.75
  text "SDA" at 3771.13,3203.63 h15.75
  text "5V" at 4409.01,3204.18 h15.75
  text "GND" at 4440.5,3204.18 h15.75
Bottom Silkscreen Layer:
  lines w7.87 net "": 4170,3850 4235,3785 4235,3783.12 4288.12,3730 4435,3730 4505,3660 4505,3570 4580,3495 4855,3495 4895,3535 4955.11,3535 4955.11,3510 5110,3510 5110,4220 5025,4220 4965,4160 4945,4160 4940,4165 4940,4240 4920,4260 4630,4260 4630.4,4217.98 4587.01,4217.98 4510,4139.82 4510,4072.91 4417.09,3980 4385,3980 4315,4050 4215,3950 4215,3935 4170,3890 4170,3850
  text "8MHz" at 4180,4180 h23.62 r45
  text "AMS1117" at 4364.91,4012.45 h23.62 r315
  text "STM32" at 3885,3930 h23.62 r45
  text "Analog GND" at 4830,3810 h31.5
  text "CurrSense" at 4865,3515 h27.56